# EAGLE board 3ch mix 1.4 (EAGLE 6.5.0)

Size 29 x 110 mm. Coordinates in mm from the lower left corner, seen from the top.
Outline: 29,0 29,110 0,110 0,0 29,0
Copper layers (1*16): Top 0.035mm / dielectric 1.5mm / Bottom 0.035mm
Design rules "hackvana 15 mil pads 24 mil thermal": minimum track width 6mil, minimum drill 0.3mm, track to track 6mil, track to pad 6mil, pad to pad 6mil, via to via 6mil, smd to smd 0mil, copper to edge 6mil, drill to drill 6mil, minimum pad ring 15mil, minimum via ring 6mil, stop-mask expansion 2mil, vias tented up to drill 100mil, thermal gap 24mil
Holes 2 mm at 22.04,5.97 6.99,20 6.99,5.97 6.99,33.97
Holes 3.2 mm at 21.98,20 22.04,33.97 21.34,100.58 3.31,76.71

## Footprints (pad centres in the part's own frame; a part is rotated, then mirrored left to right if it is on the bottom)
C025-024X044 = drill 0.813 octagon: 1 -1.27,0; 2 1.27,0
E2-5 = drill 0.813 pad 1.27: + -1.016,0 | drill 0.813 pad 1.27 octagon: - 1.016,0
DO41-7 = drill 1.2 pad 1.6 long: A 4.445,0; C -4.445,0
TO92-LINE = drill 0.813 long: 1 2.54,0; 2 0,0; 3 -2.54,0
DIL14 = drill 0.813 long: 1 -7.62,-3.81; 2 -5.08,-3.81; 3 -2.54,-3.81; 4 0,-3.81; 5 2.54,-3.81; 6 5.08,-3.81; 7 7.62,-3.81; 8 7.62,3.81; 9 5.08,3.81; 10 2.54,3.81; 11 0,3.81; 12 -2.54,3.81; 13 -5.08,3.81; 14 -7.62,3.81
ERTHENVAR-SLOTS = smd 3.2 x 1.4 bottom: NORMLB 0,-3.3; TIPB 0,4.8 | smd 3.2 x 1.4: NORMLT 0,-3.3; TIPT 0,4.8 | smd 1.7 x 3.1 bottom: RING1B -4.7,-0.6 | smd 1.7 x 3.1: RING1T -4.7,-0.6 | drill 1.3 pad 1.778 square: RING2H 4.7,-0.8
MA03-1 = drill 1.016 square: 1 -2.54,0; 2 0,0; 3 2.54,0
POT-ALPHA9 = drill 1.6 pad 2.184 square: GND$1 -5,0; GND$2 5,0 | drill 1: LEFT -2.5,-7; MID 0,-7; RIGHT 2.5,-7
CON10L = drill 0.914 pad 1.778 octagon: 1 5.08,1.27 | drill 0.914 pad 1.778 square: 2 5.08,-1.27; 3 2.54,1.27; 4 2.54,-1.27; 5 0,1.27; 6 0,-1.27; 7 -2.54,1.27; 8 -2.54,-1.27; 9 -5.08,1.27; 10 -5.08,-1.27
0207/9 = drill 0.813: 1 -4.58,0; 2 4.58,0
0204/5 = drill 0.813 octagon: 1 -2.54,0; 2 2.54,0

## Placement (x,y rotation side)
C1  100nF  [C025-024X044]  34.3,54.1 270 bottom  (outside the outline)
C2  100nF  [C025-024X044]  39.12,54.36 90 bottom  (outside the outline)
C3  10uF  [E2-5]  25.15,55.63 180 bottom
C4  10uF  [E2-5]  25.15,50.04 180 bottom
C5  100nF  [C025-024X044]  -15.74,59.69 180 bottom  (outside the outline)
C6  100nF  [C025-024X044]  -8.63,69.6 180 bottom  (outside the outline)
C7  100nF  [C025-024X044]  -18.28,102.36 90 bottom  (outside the outline)
C8  100nF  [C025-024X044]  -4.06,89.15 90 bottom  (outside the outline)
C9  10uF  [E2-5]  18.8,115.57 180 bottom  (outside the outline)
C10  68pF  [C025-024X044]  -8.25,82.11 0 bottom  (outside the outline)
C11  68pF  [C025-024X044]  -13.96,72.39 270 bottom  (outside the outline)
C12  68pF  [C025-024X044]  -18.28,53.85 270 bottom  (outside the outline)
D1  1N5818  [DO41-7]  23.12,74.42 90 top
D2  1N5818  [DO41-7]  27.19,74.42 90 top
D3  LM4040 5V  [TO92-LINE]  24.84,107.89 180 bottom
IC1  TL084  [DIL14]  10.68,66.04 180 bottom
IC2  TL084  [DIL14]  10.42,90.93 0 top
IN1  ERTHENVAR_3.5MM_JACKSLOTS  [ERTHENVAR-SLOTS]  7,34 0 top
IN2  ERTHENVAR_3.5MM_JACKSLOTS  [ERTHENVAR-SLOTS]  7,20 0 top
IN3  ERTHENVAR_3.5MM_JACKSLOTS  [ERTHENVAR-SLOTS]  7,6 0 top
JP1  [MA03-1]  14.49,45.21 180 bottom
OUT1  ERTHENVAR_3.5MM_JACKSLOTS  [ERTHENVAR-SLOTS]  22,34 0 top
OUT2  ERTHENVAR_3.5MM_JACKSLOTS  [ERTHENVAR-SLOTS]  22,20 0 top
OUT3  ERTHENVAR_3.5MM_JACKSLOTS  [ERTHENVAR-SLOTS]  22,6 0 top
POT1  22K  [POT-ALPHA9]  14.5,105 0 top
POT2  22K  [POT-ALPHA9]  14.5,80 0 top
POT3  22K  [POT-ALPHA9]  14.5,55 0 top
POWER  [CON10L]  24.14,92.2 270 bottom
R1  10R  [0207/9]  34.55,63.5 270 bottom  (outside the outline)
R2  10R  [0207/9]  38.62,63.75 270 bottom  (outside the outline)
R3  10K  [0204/5]  33.85,104.2 0 top
R4  22K  [0204/5]  -4.31,26.67 90 bottom  (outside the outline)
R5  22K  [0204/5]  -4.06,16.76 270 bottom  (outside the outline)
R6  22K  [0204/5]  -4.82,7.37 270 bottom  (outside the outline)
R7  10K  [0204/5]  -8.12,88.9 90 bottom  (outside the outline)
R8  10K  [0204/5]  -12.95,103.12 270 bottom  (outside the outline)
R9  10K  [0204/5]  -11.68,34.54 180 bottom  (outside the outline)
R10  22K  [0204/5]  -8.63,103.12 270 bottom  (outside the outline)
R11  22K  [0204/5]  -15.74,63.25 0 bottom  (outside the outline)
R12  22K  [0204/5]  -7.36,39.88 0 bottom  (outside the outline)
R13  22K  [0204/5]  -5.07,102.62 270 bottom  (outside the outline)
R14  22K  [0204/5]  -15.74,65.79 0 bottom  (outside the outline)
R15  22K  [0204/5]  -7.36,42.93 0 bottom  (outside the outline)
R16  330R  [0204/5]  -6.09,95.5 180 bottom  (outside the outline)
R17  330R  [0204/5]  -3.29,69.6 90 bottom  (outside the outline)
R18  22K  [0204/5]  -7.61,51.56 180 bottom  (outside the outline)
R19  22K  [0204/5]  -7.36,54.86 180 bottom  (outside the outline)
R20  22K  [0204/5]  -7.36,57.91 180 bottom  (outside the outline)
R21  22K  [0204/5]  -7.1,61.98 0 bottom  (outside the outline)
R22  22K  [0204/5]  -25.9,51.05 180 bottom  (outside the outline)
R23  22K  [0204/5]  -14.47,53.09 270 bottom  (outside the outline)
R24  330R  [0204/5]  -14.47,44.45 270 bottom  (outside the outline)

## Library data of the parts
C1-C12 D1-D3 IC1 IC2 IN1-IN3 OUT1-OUT3 POT1-POT3 R1-R24 = Roll Your Own
JP1 POWER = Roll Your Own; OC_FARNELL: unknown; OC_NEWARK: unknown

## Nets
0V: C1.2 C2.1 C3.- C4.+ C5.2 C6.1 C7.2 C8.1 C9.- D3.3 IC2.5 IC2.10 IN1.RING1B IN1.RING1T IN1.RING2H IN2.RING1B IN2.RING1T IN2.RING2H IN3.RING1B IN3.RING1T IN3.RING2H JP1.1 OUT1.RING1B OUT1.RING1T OUT1.RING2H OUT2.RING1B OUT2.RING1T OUT2.RING2H OUT3.RING1B OUT3.RING1T OUT3.RING2H POT1.GND$1 POT1.GND$2 POT1.LEFT POT2.GND$1 POT2.GND$2 POT2.LEFT POT3.GND$1 POT3.GND$2 POT3.LEFT POWER.3 POWER.4 POWER.5 POWER.6 POWER.7 POWER.8
+12V: C1.1 C3.+ C5.1 C7.1 IC1.4 IC2.4 R1.2 R3.2
-12V: C2.2 C4.- C6.2 C8.2 IC1.11 IC2.11 R2.2
N$1: D1.A POWER.9 POWER.10
N$2: D2.C POWER.1 POWER.2
N$3: IC2.8 R21.2 R22.1
N$4: C12.1 IC2.6 R22.2 R23.1
N$5: D1.C R1.1
N$6: D2.A R2.1
N$7: C9.+ D3.2 JP1.3 R3.1 R4.1
N$8: OUT1.TIPB OUT1.TIPT R13.2 R16.2
N$9: IC1.12 R7.2
N$10: IC1.3 R8.2
N$11: IC2.12 R9.2
N$12: IC1.13 IC1.14 POT1.RIGHT R10.1
N$13: IC1.1 IC1.2 POT2.RIGHT R11.1
N$14: IC2.13 IC2.14 POT3.RIGHT R12.1
N$15: C10.2 IC1.6 R10.2 R13.1
N$16: IC1.5 POT1.MID
N$17: IC2.3 POT2.MID
N$18: IC1.10 POT3.MID
N$19: OUT2.TIPB OUT2.TIPT R14.2 R17.2
N$20: IN1.TIPB IN1.TIPT R7.1
N$21: C11.2 IC2.2 R11.2 R14.1
N$22: IC1.9 R12.2 R15.1
N$23: OUT3.TIPB OUT3.TIPT R23.2 R24.2
N$24: IN2.TIPB IN2.TIPT R8.1
N$25: IC1.8 R15.2 R20.1
N$26: OUT1.NORMLB OUT1.NORMLT R18.1
N$27: OUT2.NORMLB OUT2.NORMLT R19.1
N$28: IC2.9 R18.2 R19.2 R20.2 R21.1
N$29: C12.2 IC2.7 R24.1
N$30: IN1.NORMLB IN1.NORMLT R4.2
N$31: IN2.NORMLB IN2.NORMLT R5.2
N$32: IN3.NORMLB IN3.NORMLT R6.2
N$33: JP1.2 R5.1 R6.1
N$34: IN3.TIPB IN3.TIPT R9.1
N$35: C10.1 IC1.7 R16.1
N$36: C11.1 IC2.1 R17.1

## Tracks (layer width: path | path; a pad name or v marks a point on that pad's centre or on a via)
0V  (45 unrouted)
+12V  (7 unrouted)
-12V  (6 unrouted)
N$1  (2 unrouted)
N$2  (2 unrouted)
N$3  (2 unrouted)
N$4  (3 unrouted)
N$5  (1 unrouted)
N$6  (1 unrouted)
N$7  (4 unrouted)
N$8  (3 unrouted)
N$9  (1 unrouted)
N$10  (1 unrouted)
N$11  (1 unrouted)
N$12  (3 unrouted)
N$13  (3 unrouted)
N$14  (3 unrouted)
N$15  (3 unrouted)
N$16  (1 unrouted)
N$17  (1 unrouted)
N$18  (1 unrouted)
N$19  (3 unrouted)
N$20  (2 unrouted)
N$21  (3 unrouted)
N$22  (2 unrouted)
N$23  (3 unrouted)
N$24  (2 unrouted)
N$25  (2 unrouted)
N$26  (2 unrouted)
N$27  (2 unrouted)
N$28  (4 unrouted)
N$29  (2 unrouted)
N$30  (2 unrouted)
N$31  (2 unrouted)
N$32  (2 unrouted)
N$33  (2 unrouted)
N$34  (2 unrouted)
N$35  (2 unrouted)
N$36  (2 unrouted)

## Text on the board
bPlace: Pb | -12V | Off | On | Offset | Ch 2&3 | Roll Your Own | Vertmix 1.4 | ljunggrenaudio.com 2015